# EAGLE board Rev3 (EAGLE 6.5.0)
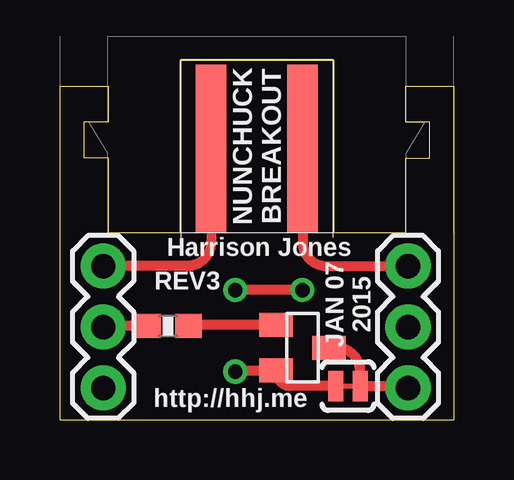
[diagram p0: board, top side]
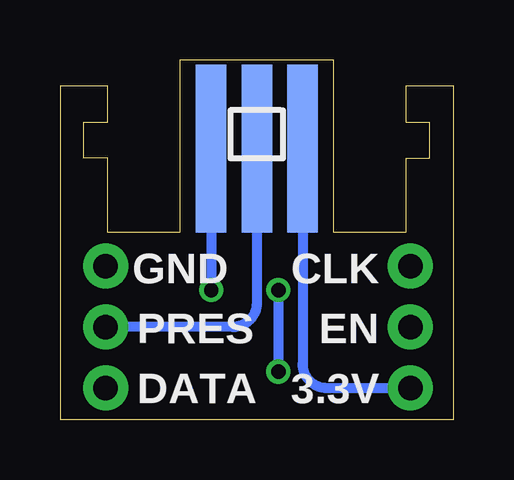
[diagram p1: board, bottom side, seen from below]

Size 16.4 x 15 mm. Coordinates in mm from the lower left corner, seen from the top.
Outline: 0,0 0,13.9 2,13.9 2,12.4 1,12.4 1,10.9 2,10.9 2,7.8 5,7.8 5,15 11.4,15 11.4,7.8 14.4,7.8 14.4,10.9 15.4,10.9 15.4,12.4 14.4,12.4 14.4,13.9 16.4,13.9 16.4,0 0,0
Copper layers (1*16): Top 0.035mm / dielectric 1.5mm / Bottom 0.035mm
Design rules "default": minimum track width 10mil, minimum drill 0.6mm, track to track 8mil, track to pad 8mil, pad to pad 8mil, via to via 8mil, smd to smd 8mil, copper to edge 40mil, drill to drill 8mil, minimum pad ring 10mil, minimum via ring 8mil, stop-mask expansion 4mil, vias tented up to drill 0mil, thermal gap 10mil

## Footprints (pad centres in the part's own frame; a part is rotated, then mirrored left to right if it is on the bottom)
1X03 = drill 1.016 pad 1.88: 1 0,0; 2 2.54,0; 3 5.08,0
SOT23 = smd 1 x 1.4: 1 -0.95,-1.1; 2 0.95,-1.1; 3 0,1.1
0603-RES = smd 1.1 x 1: 1 -0.85,0; 2 0.85,0
SJ_2S-TRACE = smd 0.635 x 1.27: 1 -0.508,0; 2 0.508,0
NUNCHUCK-LOCK = smd 1.27 x 6.985 bottom: 3.3V -1.905,1.5; DATA 1.905,1.5; PRESENCE 0,1.5 | smd 1.27 x 6.985: CLK -1.905,1.5; GND 1.905,1.5

## Placement (x,y rotation side)
JP1  [1X03]  1.8,6.4 270 top
JP2  [1X03]  14.5,6.4 270 top
Q2  [SOT23]  10.1,3 270 top
R2  [0603-RES]  4.5,3.9 0 top
SJ1  SOLDERJUMPERTRACE  [SJ_2S-TRACE]  12,1.4 0 top
U$1  NUNCHUCKLOCL  [NUNCHUCK-LOCK]  8.2,9.8 0 top

## Library data of the parts
JP1 JP2 = SparkFun-Connectors
Q2 = SparkFun-DiscreteSemi
R2 = SparkFun-Resistors
SJ1 = SparkFun-Passives
U$1 = HHJ

## Nets
3.3V: JP1.3 U$1.3.3V
EN: JP1.2 R2.1
GND: JP2.1 U$1.GND
N$1: Q2.1 R2.2
N$6: JP2.3 Q2.3 SJ1.2
PRES: JP2.2 U$1.PRESENCE
SCL: JP1.1 U$1.CLK
SDA: Q2.2 SJ1.1 U$1.DATA

## Tracks (layer width: path | path; a pad name or v marks a point on that pad's centre or on a via)
3.3V
  Bottom 0.406: U$1.3.3V 6.29,2.32 arc-90 5.29,1.32 JP1.3
EN
  Top 0.406: R2.1 1.84,3.9 arc90 JP1.2
GND
  Top 0.406: U$1.GND 10.11,7.4 arc90 11.11,6.4 JP2.1
N$1
  Top 0.406: Q2.1 5.4,3.95 arc90 R2.2
N$6
  Top 0.406: JP2.3 arc90 14.42,1.4 SJ1.2 12.51,2 arc90 11.51,3 Q2.3
PRES
  Bottom 0.406: U$1.PRESENCE 8.2,4.86 arc90 9.2,3.86 JP2.2
SCL
  Top 0.406: U$1.CLK 6.29,7.4 arc-90 5.29,6.4 JP1.1
SDA  (via drill 0.6)
  Top 0.406: SJ1.1 9.55,1.4 arc-90 Q2.2 | 9.1,2.05 Q2.2 | v10.1,5.4 v7.3,5.4 | v7.3,2 arc-90 7.45,2.05 Q2.2
  Bottom 0.406: U$1.DATA v10.11,5.41 arc-90 v10.1,5.4 | v7.3,5.4 v7.3,2

## Text on the board
tPlace: NUNCHUCK / BREAKOUT | Harrison Jones | REV3 | JAN 07 / 2015 | http://hhj.me
bPlace: CLK | GND | EN | PRES | 3.3V | DATA